# EAGLE board CT_schematic (EAGLE 7.6.0)

Size 100 x 80 mm. Coordinates in mm from the lower left corner, seen from the top.
Outline: 0,0 100,0 100,80 0,80 0,0
Copper layers (1*16): Top 0.035mm / dielectric 1.5mm / Bottom 0.035mm
Design rules "default": minimum track width 10mil, minimum drill 24mil, track to track 8mil, track to pad 8mil, pad to pad 8mil, via to via 8mil, smd to smd 8mil, copper to edge 40mil, drill to drill 8mil, minimum pad ring 10mil, minimum via ring 8mil, stop-mask expansion 4mil, vias tented up to drill 0mil, thermal gap 10mil

## Footprints (pad centres in the part's own frame; a part is rotated, then mirrored left to right if it is on the bottom)
C0603 = smd 0.8 x 0.8: 1 -0.762,0; 2 0.762,0
C0402 = smd 0.5 x 0.5: 1 -0.508,0; 2 0.508,0
C1210 = smd 1.2 x 2.5: 1 -1.524,0; 2 1.524,0
C0805 = smd 1.2 x 1.3: 1 -1.016,0; 2 1.016,0
EXV-9H = smd 3.505 x 1.676: 1 -2.857,0; 2 2.857,0
PJ-037B_PACKAGE = drill 3.7 square: 1 12,0 | drill 3.2 square: 2 6,0
R0603 = smd 0.8 x 0.8: 1 -0.762,0; 2 0.762,0
QFN-32 = smd 0.6 x 0.3: 1 -2.3,1.75; 2 -2.3,1.25; 3 -2.3,0.75; 4 -2.3,0.25; 5 -2.3,-0.25; 6 -2.3,-0.75; 7 -2.3,-1.25; 8 -2.3,-1.75; 17 2.3,-1.75; 18 2.3,-1.25; 19 2.3,-0.75; 20 2.3,-0.25; 21 2.3,0.25; 22 2.3,0.75; 23 2.3,1.25; 24 2.3,1.75 | smd 0.3 x 0.6: 9 -1.75,-2.3; 10 -1.25,-2.3; 11 -0.75,-2.3; 12 -0.25,-2.3; 13 0.25,-2.3; 14 0.75,-2.3; 15 1.25,-2.3; 16 1.75,-2.3; 25 1.75,2.3; 26 1.25,2.3; 27 0.75,2.3; 28 0.25,2.3; 29 -0.25,2.3; 30 -0.75,2.3; 31 -1.25,2.3; 32 -1.75,2.3 | smd 3.2 x 3.2: EXP 0,0
ETRX3587 = smd 1 x 1.4: 1 0,0; 2 1.27,0; 3 2.54,0; 4 3.81,0; 5 5.08,0; 6 6.35,0; 7 7.62,0; 8 8.89,0; 9 10.16,0; 10 11.43,0; 11 12.7,0; 12 13.97,0; 13 15.24,0; 14 16.51,0; 15 17.78,0; 16 19.05,0; 17 20.32,0; 18 21.59,0; 19 22.86,0; 20 22.86,18.8; 21 21.59,18.8; 22 20.32,18.8; 23 19.05,18.8; 24 17.78,18.8; 25 16.51,18.8; 26 15.24,18.8; 27 13.97,18.8; 28 12.7,18.8; 29 11.43,18.8; 30 10.16,18.8; 31 8.89,18.8; 32 7.62,18.8; 33 6.35,18.8
TST-110-05-T-D-RA = drill 1 pad 1.7 square: 1 0,0 | drill 1 pad 1.7: 2 0,2.54; 3 2.54,0; 4 2.54,2.54; 5 5.08,0; 6 5.08,2.54; 7 7.62,0; 8 7.62,2.54; 9 10.16,0; 10 10.16,2.54; 11 12.7,0; 12 12.7,2.54; 13 15.24,0; 14 15.24,2.54; 15 17.78,0; 16 17.78,2.54; 17 20.32,0; 18 20.32,2.54; 19 22.86,0; 20 22.86,2.54
SOT-23-8 = smd 0.4 x 1.2: 1 -0.975,-1.3; 2 -0.325,-1.3; 3 0.325,-1.3; 4 0.975,-1.3; 5 0.975,1.3; 6 0.325,1.3; 7 -0.325,1.3; 8 -0.975,1.3
182-009-MALE = drill 1.194 pad 1.524 octagon: 1 -5.537,10.923; 2 -2.769,10.923; 3 0,10.923; 4 2.769,10.923; 5 5.537,10.923; 6 -4.153,8.08; 7 -1.384,8.08; 8 1.384,8.08; 9 4.153,8.08 | hole 3.048: -12.446,9.501; 12.446,9.501
SJ-43515TS-SMT-TR = smd 2.2 x 3: 1 0.6,-7.4; 4 3.4,-7.4 | smd 3 x 3: 2 12.8,-7.4; 5 17,-3 | smd 2 x 3: 3 5.3,0; 6 2.5,0 | drill 1.8: P$7 4.5,-3.69; P$8 11.54,-3.69
WM-64PC = drill 0.6 pad 1: 1 -1,0.95; 2 -1,-0.95
ABS07-32.768KHZ-7-T = smd 1.1 x 2.4: 1 -2.5,0; 2 0,0
ASFL1 = smd 1.7 x 1.5: 1 -1.27,-1.1; 2 1.27,-1.1; 3 1.27,1.1; 4 -1.27,1.1
WSON-8 = smd 0.3 x 0.6: 1 -0.75,0; 2 0.05,0; 3 0.85,0; 4 1.65,0; 5 1.65,3.8; 6 0.85,3.8; 7 0.05,3.8; 8 -0.75,3.8 | smd 3 x 2.6: PAD 0.45,1.9
SON-6 = smd 0.55 x 0.3: 1 -0.355,0.5 | smd 0.52 x 0.3: 2 -0.37,0; 3 -0.37,-0.5; 4 0.37,-0.5; 5 0.37,0; 6 0.37,0.5
SW_4-1437565-2 = smd 1.4 x 2.1: 1 -2.23,4.55; 2 -2.23,-4.55; 3 2.23,4.55; 4 2.23,-4.55
LGM67K-G1J2-24-Z = smd 0.8 x 1.4: A -2,0; C 0,0
NC7SZ125M5X = smd 1.3 x 0.7: 1 -1.3,0.95; 2 -1.3,0; 3 -1.3,-0.95; 4 1.3,-0.95; 5 1.3,0.95

## Placement (x,y rotation side)
C1  1e-07  [C0603]  -38.1,87.63 0 top  (outside the outline)
C2  1e-07  [C0603]  -41.91,87.63 0 top  (outside the outline)
C3  1e-07  [C0603]  -45.72,87.63 0 top  (outside the outline)
C4  1e-07  [C0603]  -49.53,87.63 0 top  (outside the outline)
C5  4.7e-06  [C0603]  -34.29,87.63 0 top  (outside the outline)
C6  1e-08  [C0603]  -53.34,87.63 0 top  (outside the outline)
C7  1e-06  [C0603]  -57.15,87.63 0 top  (outside the outline)
C8  1e-11  [C0402]  -57.15,92.71 0 top  (outside the outline)
C9  1e-11  [C0402]  -60.96,92.71 0 top  (outside the outline)
C10  1e-07  [C0402]  -64.77,92.71 0 top  (outside the outline)
C11  1e-07  [C0402]  -68.58,92.71 0 top  (outside the outline)
C12  1e-07  [C0402]  -72.39,92.71 0 top  (outside the outline)
C13  1e-07  [C0402]  -76.2,92.71 0 top  (outside the outline)
C14  1e-06  [C0603]  -60.96,87.63 0 top  (outside the outline)
C15  1e-06  [C0603]  -64.77,87.63 0 top  (outside the outline)
C16  1e-06  [C0603]  -68.58,87.63 0 top  (outside the outline)
C17  1e-06  [C0603]  -72.39,87.63 0 top  (outside the outline)
C18  1e-06  [C0603]  -76.2,87.63 0 top  (outside the outline)
C19  1e-06  [C0603]  -80.01,87.63 0 top  (outside the outline)
C20  1e-06  [C0603]  -83.82,87.63 0 top  (outside the outline)
C21  1e-07  [C0402]  -80.01,92.71 0 top  (outside the outline)
C22  1e-07  [C0402]  -83.82,92.71 0 top  (outside the outline)
C23  1e-07  [C0402]  -87.63,92.71 0 top  (outside the outline)
C24  1e-07  [C0402]  -91.44,92.71 0 top  (outside the outline)
C25  1e-06  [C0603]  -87.63,87.63 0 top  (outside the outline)
C26  1e-08  [C0402]  -15.24,97.79 0 top  (outside the outline)
C27  1e-08  [C0402]  -19.05,97.79 0 top  (outside the outline)
C28  1e-08  [C0402]  -22.86,97.79 0 top  (outside the outline)
C29  1e-05  [C1210]  -71.12,73.66 0 top  (outside the outline)
C30  1e-05  [C0805]  -34.29,81.28 0 top  (outside the outline)
C31  1e-08  [C0402]  -26.67,97.79 0 top  (outside the outline)
C32  1e-05  [C1210]  -77.47,73.66 0 top  (outside the outline)
C33  1e-05  [C1210]  -83.82,73.66 0 top  (outside the outline)
C34  1e-07  [C0402]  -30.48,97.79 0 top  (outside the outline)
C35  0.0001  [EXV-9H]  -17.78,74.93 0 top  (outside the outline)
C36  0.0001  [EXV-9H]  -29.21,74.93 0 top  (outside the outline)
C37  1e-08  [C0402]  -34.29,97.79 0 top  (outside the outline)
C38  1e-08  [C0402]  -38.1,97.79 0 top  (outside the outline)
C39  1e-08  [C0402]  -41.91,97.79 0 top  (outside the outline)
J1  PJ-037B  [PJ-037B_PACKAGE]  -55.88,43.18 0 top  (outside the outline)
R1  10000.0  [R0603]  -59.69,81.28 0 top  (outside the outline)
R2  1000.0  [R0603]  -91.44,87.63 0 top  (outside the outline)
R3  1600.5  [R0603]  -15.24,92.71 0 top  (outside the outline)
R4  4700.0  [R0603]  -19.05,92.71 0 top  (outside the outline)
R5  4700.0  [R0603]  -22.86,92.71 0 top  (outside the outline)
R6  10000.0  [R0603]  -64.77,81.28 0 top  (outside the outline)
R7  10000.0  [R0603]  -69.85,81.28 0 top  (outside the outline)
R8  10000.0  [R0603]  -74.93,81.28 0 top  (outside the outline)
R9  10000.0  [R0603]  -80.01,81.28 0 top  (outside the outline)
R10  10000.0  [R0603]  -85.09,81.28 0 top  (outside the outline)
R11  10000.0  [R0603]  -90.17,81.28 0 top  (outside the outline)
R12  10000.0  [R0603]  -15.24,87.63 0 top  (outside the outline)
R13  10000.0  [R0603]  -20.32,87.63 0 top  (outside the outline)
R14  120.0  [R0603]  -26.67,92.71 0 top  (outside the outline)
R15  1270.0  [R0603]  -30.48,92.71 0 top  (outside the outline)
R16  1270.0  [R0603]  -34.29,92.71 0 top  (outside the outline)
R17  100000.0  [R0603]  -39.37,81.28 0 top  (outside the outline)
R18  200.0  [R0603]  -38.1,92.71 0 top  (outside the outline)
R19  1000.0  [R0603]  -41.91,92.71 0 top  (outside the outline)
R20  100000.0  [R0603]  -44.45,81.28 0 top  (outside the outline)
R21  2231.0  [R0603]  -45.72,92.71 0 top  (outside the outline)
R22  1000.0  [R0603]  -49.53,92.71 0 top  (outside the outline)
R23  10000.0  [R0603]  -25.4,87.63 0 top  (outside the outline)
R24  10000.0  [R0603]  -30.48,87.63 0 top  (outside the outline)
R25  9100.0  [R0603]  -53.34,92.71 0 top  (outside the outline)
R26  680000.0  [R0603]  -49.53,81.28 0 top  (outside the outline)
R27  120000.0  [R0603]  -54.61,81.28 0 top  (outside the outline)
U1  STM32L431KBU6  [QFN-32]  -22.86,55.88 0 top  (outside the outline)
U2  ETRX3587  [ETRX3587]  -48.26,1.27 0 top  (outside the outline)
U3  TST-110-05-T-D-RA  [TST-110-05-T-D-RA]  -82.55,62.23 0 top  (outside the outline)
U4  MAX3051EKA+T  [SOT-23-8]  -88.9,72.39 0 top  (outside the outline)
U5  182-009-113R531  [182-009-MALE]  -73.66,6.35 0 top  (outside the outline)
U6  SGTL5000XNAA3  [QFN-32]  -38.1,55.88 0 top  (outside the outline)
U7  SJ-43515TS-SMT-TR  [SJ-43515TS-SMT-TR]  -39.37,31.75 0 top  (outside the outline)
U8  SJ-43515TS-SMT-TR  [SJ-43515TS-SMT-TR]  -67.31,31.75 0 top  (outside the outline)
U9  SJ-43515TS-SMT-TR  [SJ-43515TS-SMT-TR]  -39.37,45.72 0 top  (outside the outline)
U10  WM-64PCT  [WM-64PC]  -83.82,41.91 0 top  (outside the outline)
U11  ABS07-32.768KHZ-7-T  [ABS07-32.768KHZ-7-T]  -50.8,74.93 0 top  (outside the outline)
U12  ASFL1-12MHZ-NCS  [ASFL1]  -44.45,66.04 0 top  (outside the outline)
U13  ASFL-24.57MHZ-NCS  [ASFL1]  -27.94,66.04 0 top  (outside the outline)
U14  LP3878SDX-ADJ/NOPB  [WSON-8]  -59.69,53.34 0 top  (outside the outline)
U15  LP3878SDX-ADJ/NOPB  [WSON-8]  -80.01,53.34 0 top  (outside the outline)
U16  TPS3895ADRYR  [SON-6]  -44.45,96.52 0 top  (outside the outline)
U17  4-1437565-2  [SW_4-1437565-2]  -72.39,43.18 0 top  (outside the outline)
U18  Q65110A2395  [LGM67K-G1J2-24-Z]  -59.69,73.66 0 top  (outside the outline)
U19  nc7sz125m5x  [NC7SZ125M5X]  -15.24,81.28 0 top  (outside the outline)
U20  nc7sz125m5x  [NC7SZ125M5X]  -21.59,81.28 0 top  (outside the outline)
U21  nc7sz125m5x  [NC7SZ125M5X]  -27.94,81.28 0 top  (outside the outline)

## Library data of the parts
C1-C39 J1 R1-R27 U1-U21 = circuit_tree

## Nets
CLK_CRYSTAL_U1_2: C8.1 U1.2 U11.1
CLK_CRYSTAL_U1_3: C9.1 U1.3 U11.2
CLK_U1_6: U1.6 U12.3
CLK_U6_21: U6.21 U13.3
GND: C1.2 C2.2 C3.2 C4.2 C5.2 C6.2 C7.2 C8.2 C9.2 C10.2 C11.2 C12.2 C13.2 C21.2 C22.2 C23.2 C24.2 C25.2 C26.2 C27.2 C28.2 C29.2 C30.2 C31.2 C32.2 C33.2 C34.2 C35.2 C36.2 C37.2 C38.2 C39.2 J1.2 R2.2 R6.2 R7.2 R13.2 R16.2 R19.2 R22.2 R25.2 R27.2 U1.16 U1.32 U1.EXP U2.1 U2.13 U2.19 U2.20 U2.31 U2.33 U3.4 U3.6 U3.8 U3.10 U3.12 U3.14 U3.16 U3.18 U3.20 U4.2 U4.8 U5.5 U6.1 U6.3 U6.7 U6.EXP U8.1 U9.1 U10.2 U12.2 U13.2 U14.3 U14.PAD U15.3 U15.PAD U16.2 U18.C U19.2 U19.3 U20.1 U20.3 U21.1 U21.3
NET_U1_4: R5.1 U1.4 U21.4
NET_U1_30: R3.1 U1.30 U18.A
NET_U1_31: R1.1 R6.1 U1.31 U17.3 U17.4
NET_U2_7: R4.1 U2.7 U20.4
NET_U2_21: R7.1 U2.21
NET_U3_19: R13.1 U3.19
NET_U4_6: R14.2 U4.6
NET_U5_2: R14.2 U4.6 U5.2
NET_U5_3: R14.1 U4.7 U5.3
NET_U6_10: C24.1 U6.10
NET_U6_29: R15.1 U6.29
NET_U6_31: R16.1 U6.31
NET_U7_1: U6.4 U7.1
NET_U7_2: U6.2 U7.2
NET_U7_5: U6.6 U7.5
NET_U8_2: C15.1 U8.2
NET_U8_5: C14.1 U8.5
NET_U8_11: C15.2
NET_U8_12: C14.2
NET_U9_2: C17.1 C18.1 U9.2
NET_U9_5: C16.1 U9.5
NET_U9_13: C17.2 C18.2
NET_U9_14: C16.2
NET_U10_1: C19.1 C20.1 C25.1 U6.16 U10.1
NET_U10_15: C19.2 C20.2
NET_U14_1: C28.1 U14.1
NET_U14_6: R18.2 R19.1 U14.6
NET_U14_8: R17.1 U14.8
NET_U15_1: C31.1 U15.1
NET_U15_6: R21.2 R22.1 U15.6
NET_U15_8: R20.1 U15.8
NET_U16_1: R24.1 R25.1 U16.1
NET_U16_3: R26.2 R27.1 U16.3
NET_U16_4: R23.1 U16.4 U19.4 U20.2 U21.2
NET_U17_1: R2.1 U17.1 U17.2
PROC_CAN1_RX: U1.21 U4.4
PROC_CAN1_TX: U1.22 U4.1
PROC_LPUART1_CTS: U1.12 U2.8
PROC_LPUART1_RTS: U1.15 U2.6
PROC_LPUART1_RX: U1.9 U2.17
PROC_LPUART1_TX: U1.8 U2.18
PROC_SAI1_FS_A: U1.19 U6.23
PROC_SAI1_SCK_A: U1.18 U6.24
PROC_SAI1_SD_A: U1.20 U6.26
PROC_SYS_JTCK_SWCLK: R11.1 U1.24 U3.9
PROC_SYS_JTDI: R9.1 U1.25 U3.5
PROC_SYS_JTDO_SWO: U1.26 U3.13
PROC_SYS_JTMS_SWDIO: R10.1 U1.23 U3.7
PROC_SYS_JTRST: R8.1 U1.27 U3.3
RST_OUT_U3_SRESET_B: R12.1 U3.15 U19.1
VCC_S1_15V4: C29.1 C32.1 C35.1 C36.1 J1.1 R17.2 R20.2 U14.4 U15.4
VCC_TIER1_1V2: C21.1 C30.1 R18.1 U6.30 U14.5
VCC_TIER1_3V3: C1.1 C2.1 C3.1 C4.1 C5.1 C6.1 C7.1 C10.1 C11.1 C12.1 C13.1 C22.1 C23.1 C26.1 C27.1 C33.1 C34.1 C37.1 C38.1 C39.1 R1.2 R3.2 R4.2 R5.2 R8.2 R9.2 R10.2 R11.2 R12.2 R15.2 R21.1 R23.2 R24.2 R26.1 U1.1 U1.5 U1.17 U2.32 U3.1 U3.2 U4.3 U6.5 U6.20 U12.4 U13.4 U15.5 U16.6 U19.5 U20.5 U21.5

## Tracks (layer width: path | path; a pad name or v marks a point on that pad's centre or on a via)
CLK_CRYSTAL_U1_2  (2 unrouted)
CLK_CRYSTAL_U1_3  (2 unrouted)
CLK_U1_6  (1 unrouted)
CLK_U6_21  (1 unrouted)
GND  (83 unrouted)
NET_U1_4  (2 unrouted)
NET_U1_30  (2 unrouted)
NET_U1_31  (4 unrouted)
NET_U2_7  (2 unrouted)
NET_U2_21  (1 unrouted)
NET_U3_19  (1 unrouted)
NET_U4_6  (1 unrouted)
NET_U5_2  (2 unrouted)
NET_U5_3  (2 unrouted)
NET_U6_10  (1 unrouted)
NET_U6_29  (1 unrouted)
NET_U6_31  (1 unrouted)
NET_U7_1  (1 unrouted)
NET_U7_2  (1 unrouted)
NET_U7_5  (1 unrouted)
NET_U8_2  (1 unrouted)
NET_U8_5  (1 unrouted)
NET_U9_2  (2 unrouted)
NET_U9_5  (1 unrouted)
NET_U9_13  (1 unrouted)
NET_U10_1  (4 unrouted)
NET_U10_15  (1 unrouted)
NET_U14_1  (1 unrouted)
NET_U14_6  (2 unrouted)
NET_U14_8  (1 unrouted)
NET_U15_1  (1 unrouted)
NET_U15_6  (2 unrouted)
NET_U15_8  (1 unrouted)
NET_U16_1  (2 unrouted)
NET_U16_3  (2 unrouted)
NET_U16_4  (4 unrouted)
NET_U17_1  (2 unrouted)
PROC_CAN1_RX  (1 unrouted)
PROC_CAN1_TX  (1 unrouted)
PROC_LPUART1_CTS  (1 unrouted)
PROC_LPUART1_RTS  (1 unrouted)
PROC_LPUART1_RX  (1 unrouted)
PROC_LPUART1_TX  (1 unrouted)
PROC_SAI1_FS_A  (1 unrouted)
PROC_SAI1_SCK_A  (1 unrouted)
PROC_SAI1_SD_A  (1 unrouted)
PROC_SYS_JTCK_SWCLK  (2 unrouted)
PROC_SYS_JTDI  (2 unrouted)
PROC_SYS_JTDO_SWO  (1 unrouted)
PROC_SYS_JTMS_SWDIO  (2 unrouted)
PROC_SYS_JTRST  (2 unrouted)
RST_OUT_U3_SRESET_B  (2 unrouted)
VCC_S1_15V4  (8 unrouted)
VCC_TIER1_1V2  (4 unrouted)
VCC_TIER1_3V3  (49 unrouted)